# Altium PCB PWR_REG_TEMP.PcbDoc
Units mil, origin at the board's own origin, x right, y up, seen from the top; angles counter-clockwise.
Board outline 8267.72 x 11122.05 mil, 2 copper layers (Top Layer, Bottom Layer); 104 components, 567 nets, 996 pads, 70 vias.
Unrouted connection lines stored in the file: 415.
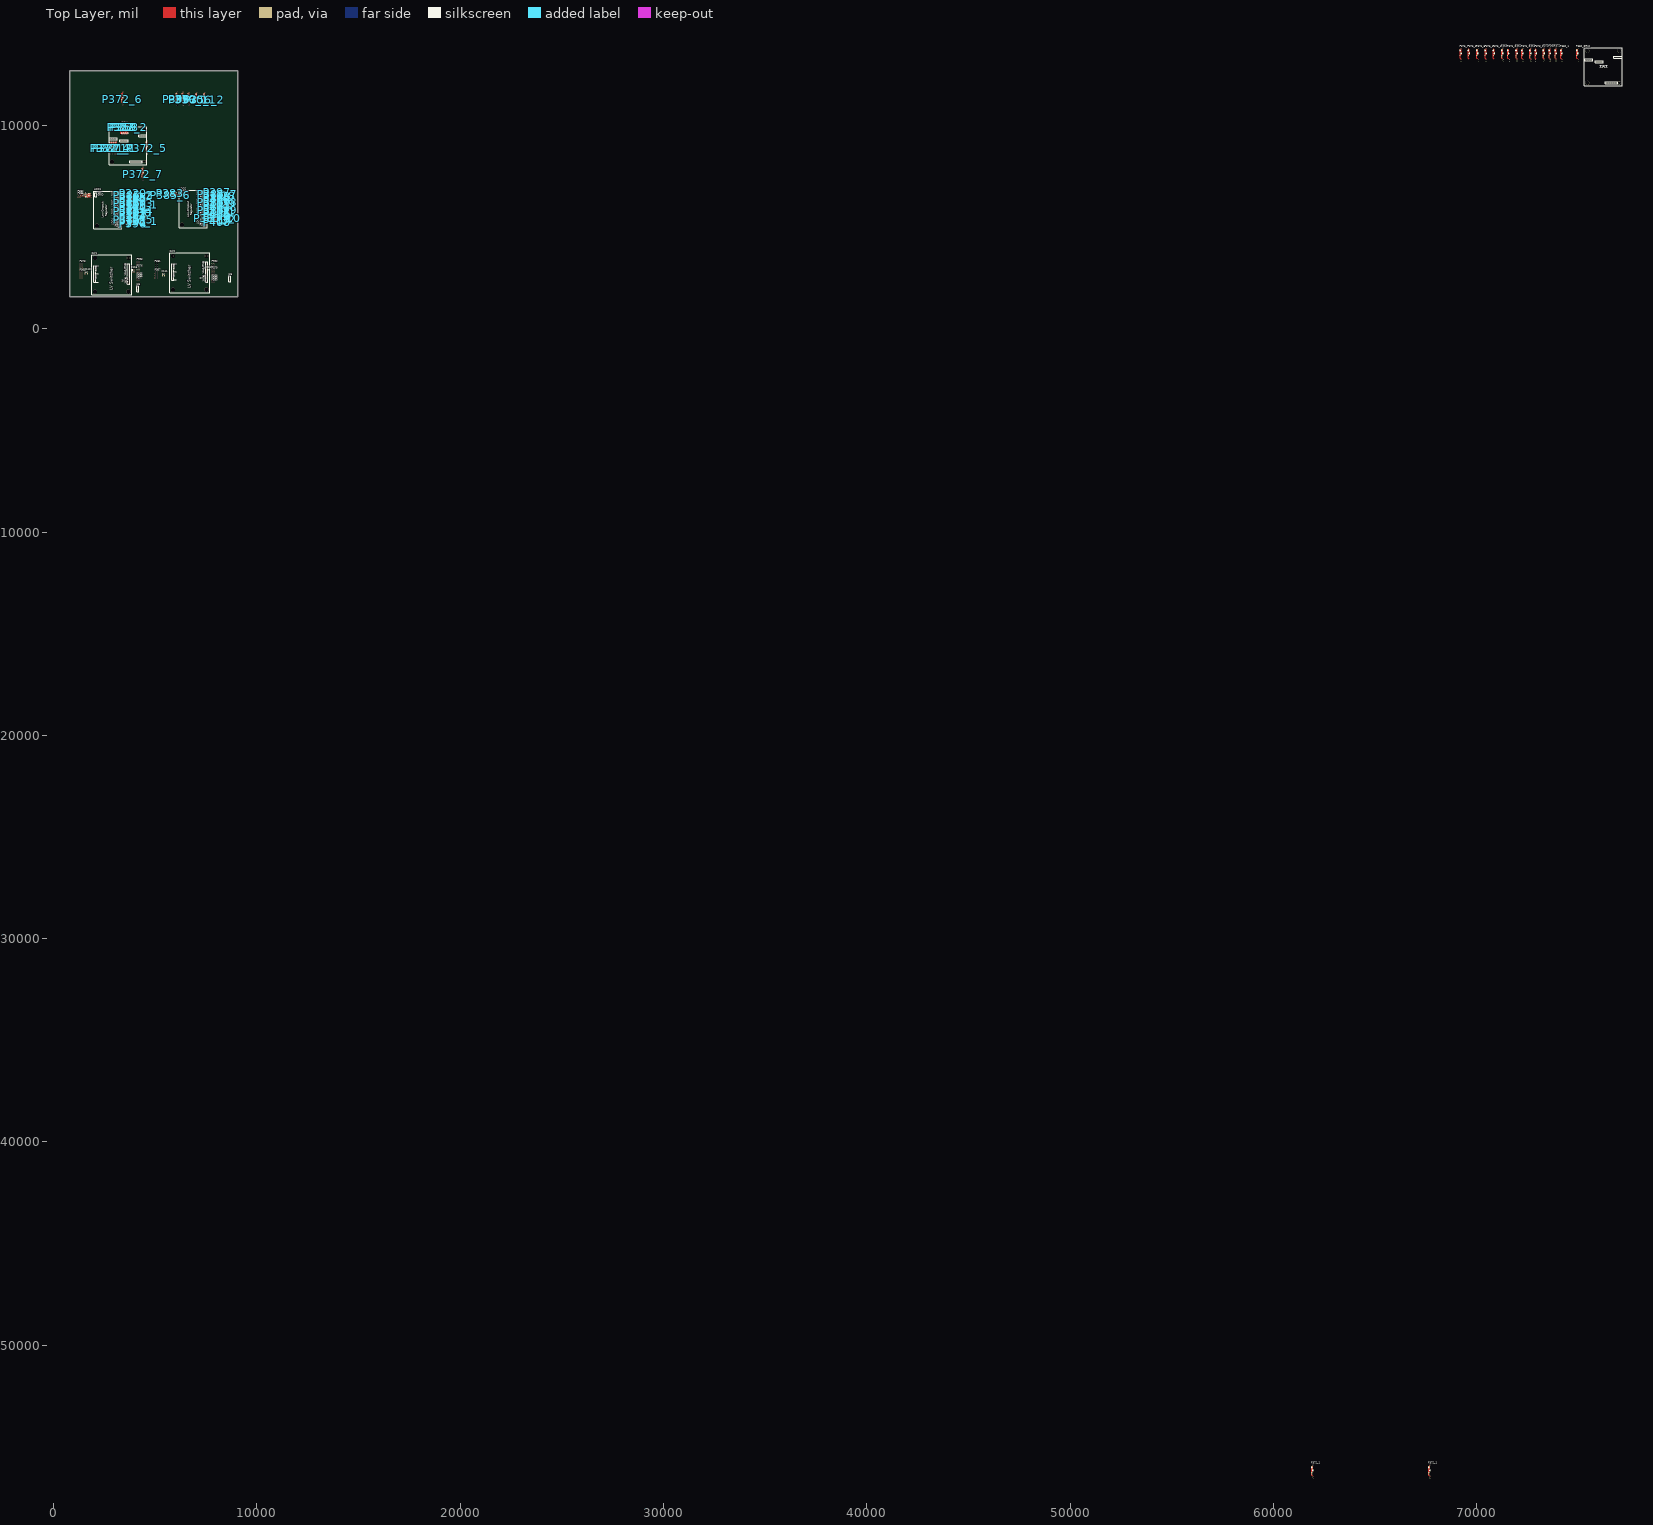
[diagram p0: Top Layer view]
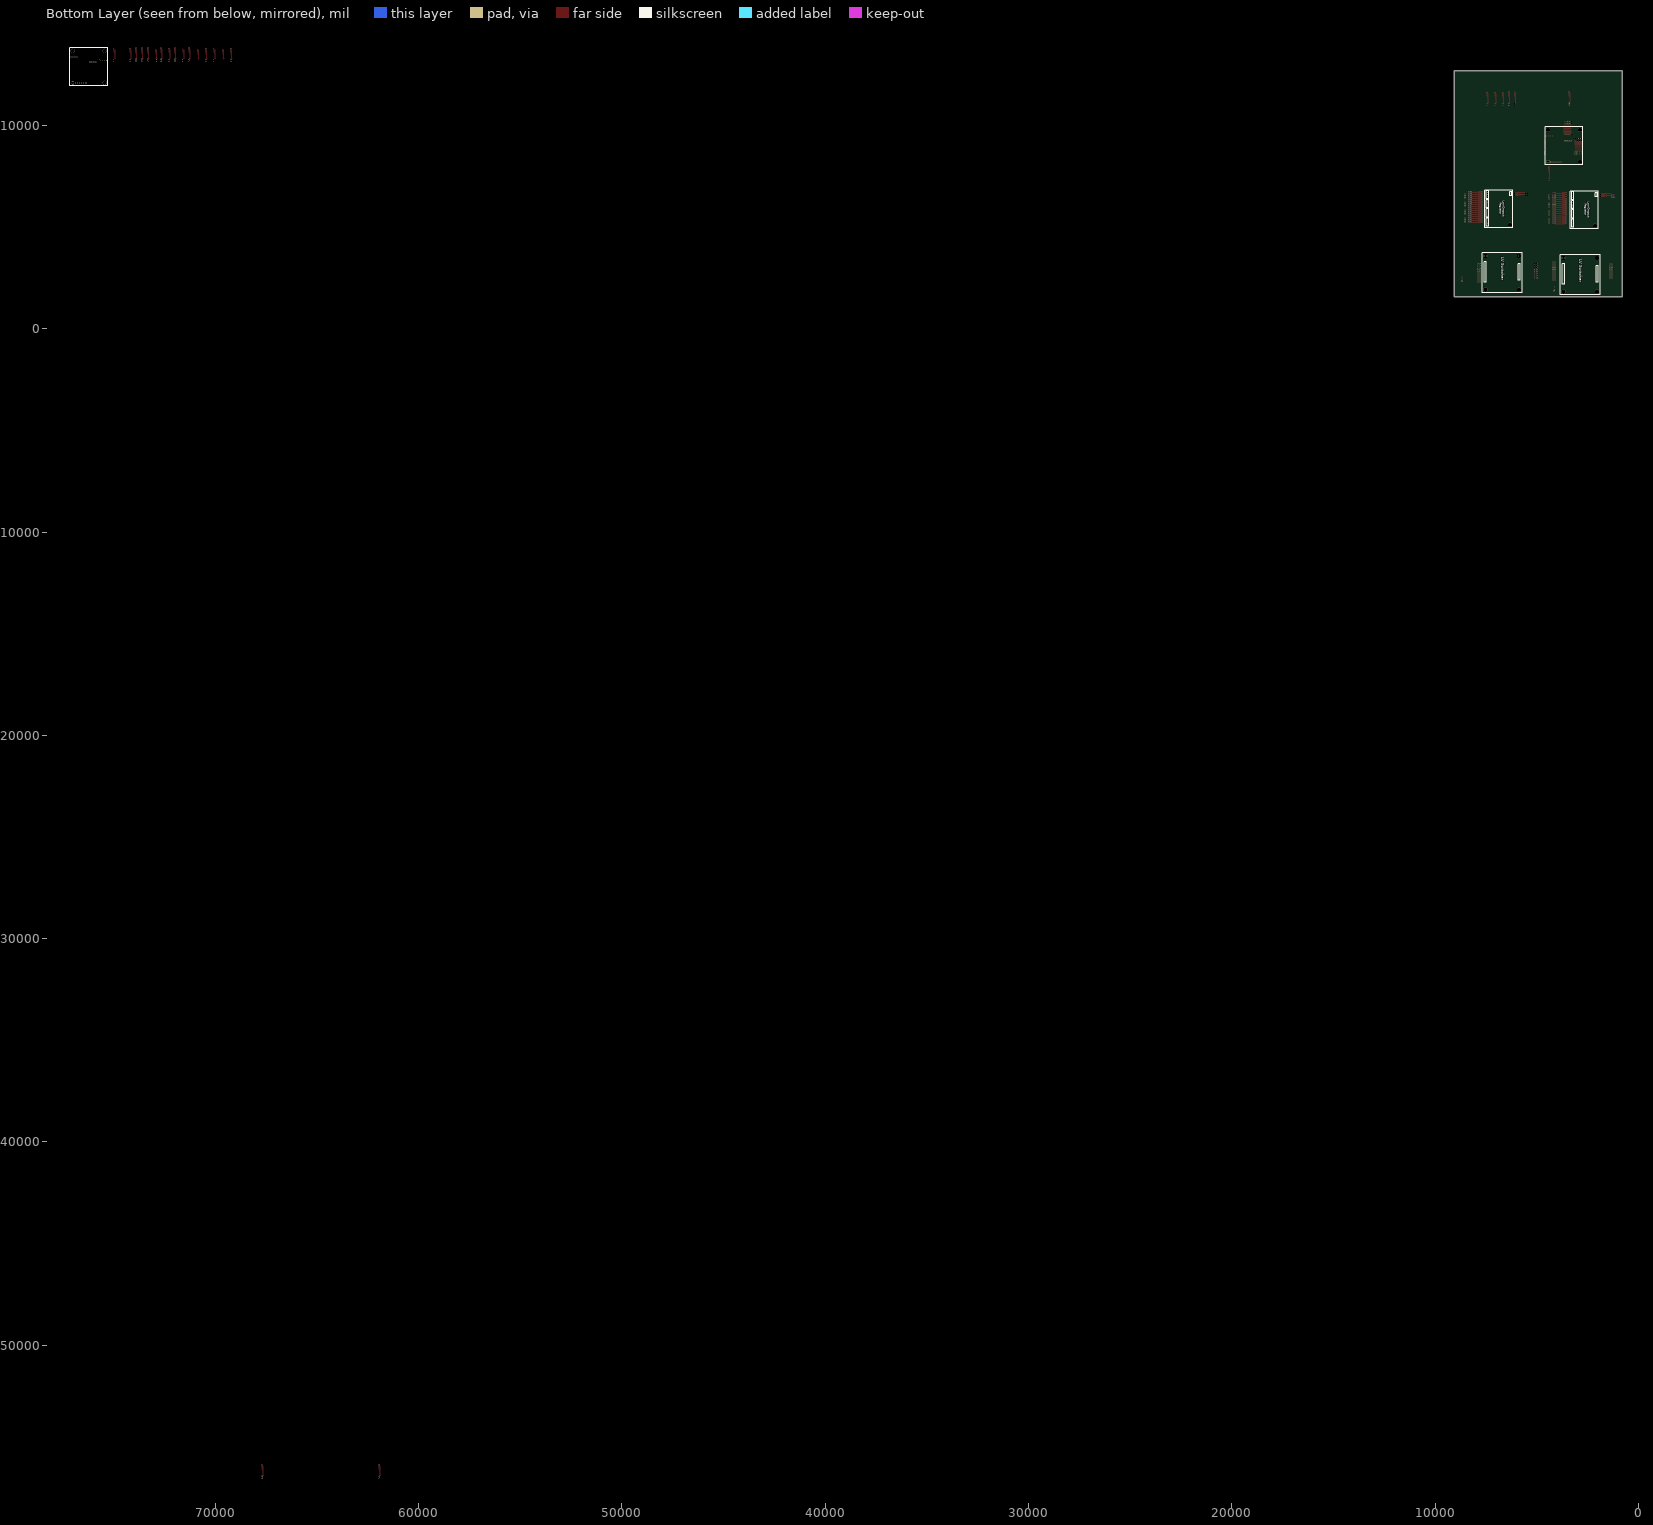
[diagram p1: Bottom Layer view, seen from below]

## Layer stack, top to bottom
Top Layer: signal copper 1.4
Dielectric: dielectric 12.6, FR-4, Dk 4.8
Bottom Layer: signal copper 1.4

## Board outline
787.4,1574.8 9055.12,1574.8 9055.12,12696.85 787.4,12696.85 787.4,12598.43

## Design rules (kind name [scope] priority, off if disabled: settings)
Clearance [All] p1: gap=10
PolygonConnect [All] p1: connectstyle=Relief reliefconductorwidth=10 reliefentries=4 polygonreliefangle="90 Angle"
RoomDefinition TRX2 [InComponentClass('TRX2')] p1: confinementstyle=ConfineIn formatcopy=TRUE lockcomponents=FALSE outline 69140,11940 80610,11940 80610,13940 69140,13940
RoomDefinition SW2 [InComponentClass('SW2')] p2: confinementstyle=ConfineIn formatcopy=TRUE lockcomponents=FALSE outline 0,0 2000,0 2000,1000 0,1000
RoomDefinition SW1 [InComponentClass('SW1')] p3: confinementstyle=ConfineIn formatcopy=TRUE lockcomponents=FALSE outline 0,0 2000,0 2000,1000 0,1000
RoomDefinition LDO2 [InComponentClass('LDO2')] p4: confinementstyle=ConfineIn formatcopy=TRUE lockcomponents=FALSE outline 0,0 2000,0 2000,1000 0,1000
RoomDefinition LDO1 [InComponentClass('LDO1')] p5: confinementstyle=ConfineIn formatcopy=TRUE lockcomponents=FALSE outline 0,0 2000,0 2000,1000 0,1000
RoutingVias [All] p1: holewidth=28 width=50 viastyle="Through Hole" minholewidth=28 minwidth=50 maxholewidth=28 maxwidth=50
SilkscreenOverComponentPads [All] p1: minsilkscreentomaskgap=10
SolderMaskExpansion [All] p1: expansion=4
Width [All] p1: maxlimit=10 minlimit=10 preferedwidth=10
27 further rules are at their usual default settings.

## Classes and differential pairs
component class LDO1: J27 J27_1 J30 J30_1 LDO1 P320 P382 P385_1 P385_2 P385_3 P385_4 P385_5 P386 P387 P388 P389 P390 P391 P392 P393 P394 P395 P396
component class LDO2: J28 J29 J31 J32 LDO2 P383 P385_6 P385_7 P385_8 P385_9 P385_10 P397 P398 P399 P400 P401 P402 P403 P404 P405 P406 P407 P408
component class SW1: F110 F116 J25 P364 P365 P366 P376 P377 P378 P993 SW1
component class SW2: F111 F117 J26 P367 P368 P369 P379 P380 P381 P992 SW2
component class TRX1: P356 P356_1 P356_2 P357 P358 P359 P370 P370_1 P371 P371_1 P372_1 P372_2 P372_3 P372_4 P372_5 P372_6 P372_7 TRX1
component class TRX2: P360 P360_1 P360_2 P361 P362 P363 P372 P372_1 P373 P373_1 P375_1 P375_2 P375_3 P375_4 P375_5 P375_6 P375_7 TRX2

## Components (designator, comment, footprint, x,y, rotation, side; value= is the part's Value field where it differs from the comment)
F110 "FilterPwr" FILTERPWR 1600,2701.57 r0 top
F111 "FilterPwr" FILTERPWR 5400,2603.15 r0 top
F116 "FilterPwr" FILTERPWR 3900,2801.57 r0 top
F117 "FilterPwr" FILTERPWR 7600,2803.15 r0 top
J25 "SW1_EN" HDR1X3 4133.86,1870.08 r90 top
J26 "SW2_EN" HDR1X3 8661.42,2362.2 r90 top
J27 "PWR" HDR1X3 4400,6400 r90 top
J27_1 "COMMS" HDR1X3 4400,6000 r90 top
J28 "BCR" HDR1X3 8530.71,6443.7 r90 top
J29 "TELEM" HDR1X3 8530.71,6050 r90 top
J30 "CSC" HDR1X3 4400,5600 r90 top
J30_1 "AUX_3" HDR1X3 4400,5200 r90 top
J31 "BBONE" HDR1X3 8530.71,5656.3 r90 top
J32 "AUX_5" HDR1X3 8530.71,5262.6 r90 top
LDO1 "3V3" LDO 1979.53,4921.26 r0 top
LDO2 "5V0" LDO 6168.5,4967.32 r0 top
P320 "Jumper_Filter" Jumper_filter 4200,6700 r180 top
P356 "Jumper_Filter" Jumper_filter 6080,10990 r90 top
P356_1 "Jumper_Filter" Jumper_filter 6660,10980 r90 top
P356_2 "Jumper_Filter" Jumper_filter 7440,10980 r90 top
P357 "Jumper_Filter" Jumper_filter 3300,10200 r270 top
P358 "Jumper_Filter" Jumper_filter 3500,10200 r270 top
P359 "Jumper_Filter" Jumper_filter 3400,10200 r270 top
P360 "Jumper_Filter" Jumper_filter 73620,13160 r90 top
P360_1 "Jumper_Filter" Jumper_filter 74200,13150 r90 top
P360_2 "Jumper_Filter" Jumper_filter 74980,13150 r90 top
P361 "Jumper_Filter" Jumper_filter 72670,13160 r90 top
P362 "Jumper_Filter" Jumper_filter 71990,13160 r90 top
P363 "Jumper_Filter" Jumper_filter 71290,13160 r90 top
P364 "Jumper3" JUMPER4 1300,2801.57 r0 top
P365 "Jumper" Jumper 4200,2601.57 r180 top
P366 "Jumper" Jumper 4200,2501.57 r180 top
P367 "Jumper3" JUMPER4 5000,2803.15 r0 top
P368 "Jumper" Jumper 7900,2503.15 r180 top
P369 "Jumper" Jumper 7800,2403.15 r0 top
P370 "Jumper_Filter" Jumper_filter 6370,10990 r90 top
P370_1 "Jumper_Filter" Jumper_filter 7050,10980 r90 top
P371 "Jumper_Filter" Jumper_filter 3000,8600 r90 top
P371_1 "Jumper_Filter" Jumper_filter 3100,8600 r90 top
P372 "Jumper_Filter" Jumper_filter 73910,13160 r90 top
P372_1 "Jumper_Filter" Jumper_filter 67700,-56550 r90 top
P372_1 "Jumper_Filter" Jumper_filter 61940,-56550 r90 top
P372_2 "Jumper_Filter" Jumper_filter 3600,10200 r270 top
P372_3 "Jumper_Filter" Jumper_filter 2900,8600 r90 top
P372_4 "Jumper_Filter" Jumper_filter 2800,8600 r90 top
P372_5 "Jumper_Filter" Jumper_filter 4600,8600 r90 top
P372_6 "Jumper_Filter" Jumper_filter 3400,11000 r90 top
P372_7 "Jumper_Filter" Jumper_filter 4400,7300 r90 top
P373 "Jumper_Filter" Jumper_filter 73330,13160 r90 top
P373_1 "Jumper_Filter" Jumper_filter 72940,13150 r90 top
P375_1 "Jumper_Filter" Jumper_filter 72280,13150 r90 top
P375_2 "Jumper_Filter" Jumper_filter 71580,13150 r90 top
P375_3 "Jumper_Filter" Jumper_filter 70880,13150 r90 top
P375_4 "Jumper_Filter" Jumper_filter 70470,13150 r90 top
P375_5 "Jumper_Filter" Jumper_filter 70060,13150 r90 top
P375_6 "Jumper_Filter" Jumper_filter 69650,13150 r90 top
P375_7 "Jumper_Filter" Jumper_filter 69240,13150 r90 top
P376 "Jumper3" JUMPER4 4100,3001.57 r0 top
P377 "Jumper" Jumper 4200,2401.57 r180 top
P378 "Jumper3" JUMPER4 1300,3201.57 r0 top
P379 "Jumper3" JUMPER4 7800,2903.15 r0 top
P380 "Jumper" Jumper 7800,2303.15 r0 top
P381 "Jumper3" JUMPER4 5000,3203.15 r0 top
P382 "Jumper_Filter" Jumper_filter 1200,6600 r0 top
P383 "Jumper_Filter" Jumper_filter 5447.24,6652.36 r0 top
P385_1 "Jumper_Filter" Jumper_filter 1200,6500 r0 top
P385_2 "Jumper_Filter" Jumper_filter 4200,6600 r180 top
P385_3 "Jumper_Filter" Jumper_filter 4200,6200 r180 top
P385_4 "Jumper_Filter" Jumper_filter 4200,5800 r180 top
P385_5 "Jumper_Filter" Jumper_filter 4200,5400 r180 top
P385_6 "Jumper_Filter" Jumper_filter 5447.24,6552.36 r0 top
P385_7 "Jumper_Filter" Jumper_filter 8333.86,6640.55 r180 top
P385_8 "Jumper_Filter" Jumper_filter 8333.86,6246.85 r180 top
P385_9 "Jumper_Filter" Jumper_filter 8333.86,5853.15 r180 top
P385_10 "Jumper_Filter" Jumper_filter 8333.86,5459.45 r180 top
P386 "Jumper_Filter" Jumper_filter 4200,6500 r180 top
P387 "Jumper_Filter" Jumper_filter 4200,6400 r180 top
P388 "Jumper_Filter" Jumper_filter 4200,6300 r180 top
P389 "Jumper_Filter" Jumper_filter 4200,6100 r180 top
P390 "Jumper_Filter" Jumper_filter 4200,6000 r180 top
P391 "Jumper_Filter" Jumper_filter 4200,5900 r180 top
P392 "Jumper_Filter" Jumper_filter 4200,5700 r180 top
P393 "Jumper_Filter" Jumper_filter 4200,5600 r180 top
P394 "Jumper_Filter" Jumper_filter 4200,5500 r180 top
P395 "Jumper_Filter" Jumper_filter 4200,5300 r180 top
P396 "Jumper_Filter" Jumper_filter 4200,5200 r180 top
P397 "Jumper_Filter" Jumper_filter 8333.86,6738.98 r180 top
P398 "Jumper_Filter" Jumper_filter 8333.86,6542.13 r180 top
P399 "Jumper_Filter" Jumper_filter 8333.86,6443.7 r180 top
P400 "Jumper_Filter" Jumper_filter 8333.86,6345.28 r180 top
P401 "Jumper_Filter" Jumper_filter 8333.86,6148.43 r180 top
P402 "Jumper_Filter" Jumper_filter 8333.86,6050 r180 top
P403 "Jumper_Filter" Jumper_filter 8333.86,5951.57 r180 top
P404 "Jumper_Filter" Jumper_filter 8333.86,5754.72 r180 top
P405 "Jumper_Filter" Jumper_filter 8333.86,5656.3 r180 top
P406 "Jumper_Filter" Jumper_filter 8333.86,5557.87 r180 top
P407 "Jumper_Filter" Jumper_filter 8333.86,5361.02 r180 top
P408 "Jumper_Filter" Jumper_filter 8333.86,5262.6 r180 top
P992 "Jumper" Jumper3 7800,3203.15 r0 top
P993 "Jumper" Jumper3 4100,3301.57 r0 top
SW1 "3.3V" LVSwitcher 1870.08,1673.23 r0 top
SW2 "5V" LVSwitcher 5708.66,1771.65 r0 top
TRX1 "TRX_REGULATOR" TRX_REGULATOR 2740,8100 r0 top
TRX2 "TRX_REGULATOR" TRX_REGULATOR 75320,11980 r0 top

## Footprints (in the part's own frame and the unit in brackets; to place one, negate y for a bottom-side part, rotate by r counter-clockwise, add the part's x,y. Pads: shape width x height; smd on the part's side, far side on the other; paste and mask are expansions set on the pad)
FILTERPWR [mm]
  rect 1.15x1.7 smd: 1(-1.425,2.35) 2(1.425,0) 2(1.425,2.35) 3(-1.425,0)
  silkscreen extent 0,1.7 0,3, body extent -1.63,-0.82 1.62,3.17, height 0.7
HDR1X3 [mm] "Connector; Header; 3 Position"
  rect 1.5x1.5 hole 0.9: 1(0,0)
  round 1.5 hole 0.9: 2(2.54,0) 3(5.08,0)
  silkscreen extent -1.27,-1.27 6.35,1.27
Jumper [mm] "Connector; Header; 2 Position"
  round 1.5 hole 0.9: 1(0,0) 2(2.54,0)
Jumper3 [mm] "Connector; Header; 2 Position"
  round 1.5 hole 0.9: 1(0,-5.08) 1(0,-2.54) 1(0,0) 2(2.54,-5.08) 2(2.54,-2.54) 2(2.54,0)
JUMPER4 [mm] "Connector; Header; 2 Position"
  round 1.5 hole 0.9: 1(0,-7.62) 1(0,-5.08) 1(0,-2.54) 1(0,0) 2(2.54,-7.62) 2(2.54,-5.08) 2(2.54,-2.54) 2(2.54,0)
Jumper_filter [mm] "Connector; Header; 2 Position"
  round 1.5 hole 0.9: 1(0,0) 2(2.54,0)
  rect 1x1.4 smd: 2(5.35,1.27) 2(7.35,1.27) 2(9.16,0) 2(12.97,1.27) 2(14.97,1.27) 3(11.16,0)
  Top Layer lines w0.152: 14.986,1.27 5.334,1.27 ; 7.366,1.27 7.366,1.016
  Top Layer lines w0.254: 16.51,0 11.43,0 ; 12.954,1.27 7.366,1.27 ; 9.144,1.27 9.144,0 ; 5.08,1.27 3.81,1.27 2.54,0
  silkscreen extent 10.16,-0.65 13.97,1.92, body extent 5.25,-0.65 15.07,1.92, height 0.5
LDO [mm] "Low-dropout Regulator"
  round 1.5 hole 0.9: EN1(31.75,40.132) EN2(31.75,28.702) EN3(31.75,17.272) EN4(31.75,5.842) GND(31.75,8.382) GND(31.75,19.812) GND(31.75,31.242) GND(31.75,42.672) VIN(2.54,43.942) VOUT1(31.75,45.212) VOUT2(31.75,33.782) VOUT3(31.75,22.352) VOUT4(31.75,10.922)
  rect 1.5x1.5 hole 0.9: GND(2.54,41.402) RST1(31.75,37.592) RST2(31.75,26.162) RST3(31.75,14.732) RST4(31.75,3.302)
  round 1 hole 0.3: ""(1.683,3.81) ""(1.951,2.81) ""(1.951,4.81) ""(2.683,2.078) ""(2.683,5.542) ""(3.683,1.81) ""(3.683,5.81) ""(4.683,2.078) ""(4.683,5.542) ""(5.415,2.81) ""(5.415,4.81) ""(5.683,3.81)
  round 5 hole 3: ""(3.683,3.81)
  silkscreen extent 0,0 34.9,46.9
LVSwitcher [mm] "Low-Voltage Switching Regulator"
  round 1.5 hole 0.9: EN(46,19.615) GND(3.975,27.235) GND(3.975,29.775) GND(3.975,32.315) GND(46,32.315) GND(46,34.855) GND(46,37.395) SYNC(46,17.075) Vin(3.975,17.075) Vin(3.975,19.615) Vin(3.975,22.155) Vin(3.975,24.695) Vout(46,22.155) Vout(46,24.695) Vout(46,27.235) Vout(46,29.775)
  rect 1.5x1.5 hole 0.9: GND(3.975,34.855) PG(46,14.535)
  round 1 hole 0.3: ""(2,4) ""(2,46) ""(2.268,3) ""(2.268,5) ""(2.268,45) ""(2.268,47) ""(3,2.268) ""(3,5.732) ""(3,44.268) ""(3,47.732) ""(4,2) ""(4,6) ""(4,44) ""(4,48) ""(5,2.268) ""(5,5.732) ""(5,44.268) ""(5,47.732) ""(5.732,3) ""(5.732,5) ""(5.732,45) ""(5.732,47) ""(6,4) ""(6,46) ""(44,4) ""(44,46) ""(44.268,3) ""(44.268,5) ""(44.268,45) ""(44.268,47) ""(45,2.268) ""(45,5.732) ""(45,44.268) ""(45,47.732) ""(46,2) ""(46,6) ""(46,44) ""(46,48) ""(47,2.268) ""(47,5.732) ""(47,44.268) ""(47,47.732) ""(47.732,3) ""(47.732,5) ""(47.732,45) ""(47.732,47) ""(48,4) ""(48,46)
  round 5 hole 3: ""(4,4) ""(4,46) ""(46,4) ""(46,46)
  silkscreen extent 0,0 50,50
TRX_REGULATOR [mm]
  round 1.5 hole 0.9: 1(27.018,2.962) 1(29.558,2.962) 1(32.098,2.962) 2(3.65,32.045) 2(34.638,2.962) 2(37.178,2.962) 2(42.791,35.27) 3(19.474,29.149) 4(16.934,29.149) 5(37.711,35.27) 5(40.251,35.27) 6(6.19,32.045) 6(8.73,32.045) 7(14.394,29.149)
  rect 1.5x1.5 hole 0.9: 2(1.11,32.045) 2(22.014,29.149) 2(39.718,2.962) 2(45.331,35.27)
  round 1 hole 0.3: ""(1.291,3.161) ""(1.291,43.161) ""(1.559,2.161) ""(1.559,4.161) ""(1.559,42.161) ""(1.559,44.161) ""(2.291,1.429) ""(2.291,4.893) ""(2.291,41.429) ""(2.291,44.893) ""(3.291,1.161) ""(3.291,5.161) ""(3.291,41.161) ""(3.291,45.161) ""(4.291,1.429) ""(4.291,4.893) ""(4.291,41.429) ""(4.291,44.893) ""(5.023,2.161) ""(5.023,4.161) ""(5.023,42.161) ""(5.023,44.161) ""(5.291,3.161) ""(5.291,43.161) ""(41.291,43.161) ""(41.559,42.161) ""(41.559,44.161) ""(42.291,41.429) ""(42.291,44.893) ""(43.291,41.161) ""(43.291,45.161) ""(44.291,41.429) ""(44.291,44.893) ""(45.023,42.161) ""(45.023,44.161) ""(45.291,43.161)
  round 5 hole 3: ""(3.291,3.161) ""(3.291,43.161) ""(43.291,43.161)
  round 4 hole 3.5: ""(43.291,3.161)
  silkscreen extent -0.41,-0.54 46.98,46.86

## Part data
J25 J26 J27 J27_1 J28 J29 J30 J30_1 J31 J32: library part "Header 3", "Header, 3-Pin"
LDO1 LDO2: library part LDO
SW1 SW2: library part LVSWITCHER

## Via types
v1: diameter 40, hole 20, Top Layer to Bottom Layer, 70 vias

## Nets (pads, with @x,y where several pads share a name; then routed paths per layer and width w, separated by ;. In a path a pad name is that pad's centre, name@x,y a point inside that pad or via, vN(x,y) a via of type N, cw(c..) or ccw(c..) an arc to the next point about the centre after c; other vN are vias at no path point)
3V3_AUX: P394.1
3V3_AUX_E\N\: J30_1.2 P395.1
3V3_BBONE: 
3V3_COMMS: P388.1
3V3_CSC: P391.1
3V3_PWR: P320.1 P357.1 P361.1
3V3_UNREG: J27.1 J27_1.1 J30.1 J30_1.1 P376.2 P382.1
5V0_AUX: P406.1
5V0_AUX_E\N\: J32.2 P407.1
5V0_BBONE: P403.1
5V0_BCR: P397.1
5V0_TELEM: P400.1
5V0_UNREG: J28.1 J29.1 J31.1 J32.1 P379.2 P383.1
8V0_RX1: P370.1 P370_1.1
8V0_RX2: 
AFSK1_DET: 
AFSK1_M0: 
AFSK1_M1: 
AFSK1_RX: 
AFSK1_RXD: 
AFSK1_TX: 
AFSK1_TXD: 
AFSK2_DET: 
AFSK2_M0: 
AFSK2_M1: 
AFSK2_RX: 
AFSK2_RXD: 
AFSK2_TX: 
AFSK2_TXD: 
BBONE_E\N\: J31.2 P404.1
BBONE_I2C2_SCL: 
BBONE_I2C2_SDA: 
BCR_E\N\: J28.2 P398.1
BCR_MISO: 
BCR_MOSI: 
BCR_R\S\T\: 
BCR_SCK: 
COMMS_E\N\: J27_1.2 P389.1
CSC_E\N\: J30.2 P392.1
CSC_ISP: 
CSC_RST: 
DTMF1Q1: 
DTMF1Q2: 
DTMF1Q3: 
DTMF1Q4: 
DTMF1ST: 
DTMF2Q1: 
DTMF2Q2: 
DTMF2Q3: 
DTMF2Q4: 
DTMF2ST: 
GND: F110.3 F111.3 F116.3 F117.3 J25.1 J26.1 J27.3 J27_1.3 J28.3 J29.3 J30.3 J30_1.3 J31.3 J32.3 P320.3 P356.3 P356_1.3 P356_2.3 P357.3 P358.3 P359.3 P360.3 P360_1.3 P360_2.3 P361.3 P362.3 P363.3 P370.3 P370_1.3 P371.3 P371_1.3 P372.3 P372_1.1@67700,-56550 P372_1.3@67700,-56110.63 P372_2.1 P372_2.3 P372_3.1 P372_3.3 P372_4.1 P372_4.3 P372_5.1 P372_5.3 P372_6.1 P372_6.3 P372_7.1 P372_7.3 P373.3 P373_1.3 P375_1.1 P375_1.3 P375_2.1 P375_2.3 P375_3.1 P375_3.3 P375_4.1 P375_4.3 P375_5.1 P375_5.3 P375_6.1 P375_6.3 P375_7.1 P375_7.3 P378.2 P381.2 P382.3 P383.3 P385_1.1 P385_1.3 P385_2.1 P385_2.3 P385_3.1 P385_3.3 P385_4.1 P385_4.3 P385_5.1 P385_5.3 P385_6.1 P385_6.3 P385_7.1 P385_7.3 P385_8.1 P385_8.3 P385_9.1 P385_9.3 P385_10.1 P385_10.3 P386.3 P387.3 P388.3 P389.3 P390.3 P391.3 P392.3 P393.3 P394.3 P395.3 P396.3 P397.3 P398.3 P399.3 P400.3 P401.3 P402.3 P403.3 P404.3 P405.3 P406.3 P407.3 P408.3 P992.2 P993.2
  other v1: 67700,-55900 3550,5200 7683.86,5262.6 3550,5300 7683.86,5361.02 3550,5400 7683.86,5459.45 3550,5500 7683.86,5557.87 3550,5600 7683.86,5656.3 3550,5700 7683.86,5754.72 3550,5800 7683.86,5853.15 3550,5900 7683.86,5951.57 3550,6000 7683.86,6050 3550,6100 7683.86,6148.43 3550,6200 7683.86,6246.85 7683.86,6345.28 3550,6400 7683.86,6443.7 1850,6500 3550,6500 7683.86,6542.13 6097.24,6552.36 1850,6600 3550,6600 7683.86,6640.55 6097.24,6652.36 3550,6700 7683.86,6738.98 4400,7950 2800,9250 2900,9250 3000,9250 3100,9250 4600,9250 3300,9550 3400,9550 3500,9550 3600,9550 6660,11630 7050,11630 7440,11630 6080,11640 6370,11640 3400,11650 69240,13800 69650,13800 70060,13800 70470,13800 70880,13800 71580,13800 72280,13800 72940,13800 74200,13800 74980,13800 71290,13810 71990,13810 72670,13810 73330,13810 73620,13810 73910,13810
I2C0_SCL: P359.1 P363.1
I2C0_SDA: P358.1 P362.1
I2C1_SCL: 
I2C1_SDA: 
I2C2_SCL: 
I2C2_SCL_5V: 
I2C2_SDA: 
I2C2_SDA_5V: 
NetBBONE1_A01: 
NetBBONE1_A02: 
NetBBONE1_A03: 
NetBBONE1_A04: 
NetBBONE1_A05: 
NetBBONE1_A06: 
NetBBONE1_A07: 
NetBBONE1_A08: 
NetBBONE1_A09: 
NetBBONE1_A10: 
NetBBONE1_A11: 
NetBBONE1_A12: 
NetBBONE1_A13: 
NetBBONE1_A14: 
NetBBONE1_A15: 
NetBBONE1_A16: 
NetBBONE1_A17: 
NetBBONE1_A18: 
NetBBONE1_A19: 
NetBBONE1_A20: 
NetBBONE1_A21: 
NetBBONE1_A22: 
NetBBONE1_A23: 
NetBBONE1_A24: 
NetBBONE1_A25: 
NetBBONE1_A26: 
NetBBONE1_A27: 
NetBBONE1_A28: 
NetBBONE1_A29: 
NetBBONE1_A30: 
NetBBONE1_A31: 
NetBBONE1_A32: 
NetBBONE1_A33: 
NetBBONE1_A34: 
NetBBONE1_A35: 
NetBBONE1_A36: 
NetBBONE1_A37: 
NetBBONE1_A38: 
NetBBONE1_A39: 
NetBBONE1_A40: 
NetBBONE1_A41: 
NetBBONE1_A42: 
NetBBONE1_A43: 
NetBBONE1_A44: 
NetBBONE1_A45: 
NetBBONE1_A46: 
NetBBONE1_B01: 
NetBBONE1_B02: 
NetBBONE1_B03: 
NetBBONE1_B04: 
NetBBONE1_B05: 
NetBBONE1_B06: 
NetBBONE1_B07: 
NetBBONE1_B08: 
NetBBONE1_B09: 
NetBBONE1_B10: 
NetBBONE1_B11: 
NetBBONE1_B12: 
NetBBONE1_B13: 
NetBBONE1_B14: 
NetBBONE1_B15: 
NetBBONE1_B16: 
NetBBONE1_B17: 
NetBBONE1_B18: 
NetBBONE1_B19: 
NetBBONE1_B20: 
NetBBONE1_B21: 
NetBBONE1_B22: 
NetBBONE1_B23: 
NetBBONE1_B24: 
NetBBONE1_B25: 
NetBBONE1_B26: 
NetBBONE1_B27: 
NetBBONE1_B28: 
NetBBONE1_B29: 
NetBBONE1_B30: 
NetBBONE1_B31: 
NetBBONE1_B32: 
NetBBONE1_B33: 
NetBBONE1_B34: 
NetBBONE1_B35: 
NetBBONE1_B36: 
NetBBONE1_B37: 
NetBBONE1_B38: 
NetBBONE1_B39: 
NetBBONE1_B40: 
NetBBONE1_B41: 
NetBBONE1_B42: 
NetBBONE1_B43: 
NetBBONE1_B44: 
NetBBONE1_B45: 
NetBBONE1_B46: 
NetBBONE1_P01: 
NetBBONE1_P02: 
NetBBONE1_P03: 
NetBBONE1_P04: 
NetBBONE1_P05: 
NetBBONE1_P06: 
NetBBONE1_P07: 
NetBBONE1_P08: 
NetBBONE1_P09: 
NetBBONE1_P10: 
NetBCR1_1: 
NetBCR1_2: 
NetBCR1_3: 
NetBCR1_4: 
NetBCR1_5: 
NetBCR1_6: 
NetBCR1_7: 
NetBCR1_8: 
NetBCR1_9: 
NetBCR1_10: 
NetBCR1_11: 
NetBCR1_12: 
NetBCR1_13: 
NetBCR1_14: 
NetBCR1_15: 
NetBCR1_16: 
NetBCR1_17: 
NetBCR1_18: 
NetBCR1_19: 
NetBCR1_20: 
NetBCR1_21: 
NetBCR1_22: 
NetBCR1_23: 
NetBCR1_24: 
NetBCR1_25: 
NetBCR1_26: 
NetBCR1_27: 
NetBCR1_28: 
NetBCR1_29: 
NetBCR1_30: 
NetBCR1_31: 
NetBCR1_32: 
NetBCR1_33: 
NetBCR1_34: 
NetBCR1_35: 
NetC1_2: 
NetCOMMS1_AFSK1_M0: 
NetCOMMS1_AFSK1_M1: 
NetCOMMS1_AFSK1_RXD: 
NetCOMMS1_AFSK1_TXD: 
NetCOMMS1_AFSK2_M0: 
NetCOMMS1_AFSK2_M1: 
NetCOMMS1_AFSK2_RXD: 
NetCOMMS1_AFSK2_TXD: 
NetCOMMS1_DTMF1_ES: 
NetCOMMS1_DTMF1_Q1: 
NetCOMMS1_DTMF1_Q2: 
NetCOMMS1_DTMF1_Q3: 
NetCOMMS1_DTMF1_Q4: 
NetCOMMS1_DTMF1_ST: 
NetCOMMS1_DTMF2_ES: 
NetCOMMS1_DTMF2_Q1: 
NetCOMMS1_DTMF2_Q2: 
NetCOMMS1_DTMF2_Q3: 
NetCOMMS1_DTMF2_Q4: 
NetCOMMS1_DTMF2_ST: 
NetCOMMS1_GMSK_RX1: 
NetCOMMS1_GMSK_RX2: 
NetCOMMS1_GMSK_TX1: 
NetCOMMS1_GMSK_TX2: 
NetCOMMS1_GND: 
NetCOMMS1_RX1: 
NetCOMMS1_RX2: 
NetCOMMS1_S0: 
NetCOMMS1_S1: 
NetCOMMS1_S2: 
NetCOMMS1_S3: 
NetCOMMS1_S4: 
NetCOMMS1_S5: 
NetCOMMS1_S6: 
NetCOMMS1_S7: 
NetCOMMS1_TX1: 
NetCOMMS1_TX2: 
NetCOMMS1_VCC: 
NetCSC1_C1_1: 
NetCSC1_C1_2: 
NetCSC1_C1_3: 
NetCSC1_C1_4: 
NetCSC1_C1_5: 
NetCSC1_C1_6: 
NetCSC1_C1_7: 
NetCSC1_C1_8: 
NetCSC1_C1_9: 
NetCSC1_C1_10: 
NetCSC1_C1_11: 
NetCSC1_C1_12: 
NetCSC1_C1_13: 
NetCSC1_C1_14: 
NetCSC1_C1_15: 
NetCSC1_C1_16: 
NetCSC1_C1_17: 
NetCSC1_C1_18: 
NetCSC1_C1_19: 
NetCSC1_C1_20: 
NetCSC1_C1_21: 
NetCSC1_C1_22: 
NetCSC1_C1_23: 
NetCSC1_C1_24: 
NetCSC1_C1_25: 
NetCSC1_C1_26: 
NetCSC1_C1_27: 
NetCSC1_C1_28: 
NetCSC1_C1_29: 
NetCSC1_C1_30: 
NetCSC1_C1_31: 
NetCSC1_C1_32: 
NetCSC1_C1_33: 
NetCSC1_C1_34: 
NetCSC1_C1_35: 
NetCSC1_C1_36: 
NetCSC1_C1_37: 
NetCSC1_C1_38: 
NetCSC1_C1_39: 
NetCSC1_C2_1: 
NetCSC1_C2_2: 
NetCSC1_C2_3: 
NetCSC1_C2_4: 
NetCSC1_C2_5: 
NetCSC1_C2_6: 
NetCSC1_C2_7: 
NetCSC1_C2_8: 
NetCSC1_C2_9: 
NetCSC1_C2_10: 
NetCSC1_C2_11: 
NetCSC1_C2_12: 
NetCSC1_C2_13: 
NetCSC1_C2_14: 
NetCSC1_C2_15: 
NetCSC1_C2_16: 
NetCSC1_C2_17: 
NetCSC1_C2_18: 
NetCSC1_C2_19: 
NetCSC1_C2_20: 
NetCSC1_C2_21: 
NetCSC1_C2_22: 
NetCSC1_C2_23: 
NetCSC1_C2_24: 
NetCSC1_C2_25: 
NetCSC1_C2_26: 
NetCSC1_C2_27: 
NetCSC1_C2_28: 
NetCSC1_C2_29: 
NetCSC1_C2_30: 
NetCSC1_C2_31: 
NetCSC1_C2_32: 
NetCSC1_C2_33: 
NetCSC1_C2_34: 
NetCSC1_C2_35: 
NetCSC1_C2_36: 
NetCSC1_C2_37: 
NetCSC1_C2_38: 
NetCSC1_C2_39: 
NetCSC1_C2_40: 
NetCSC1_C3_1: 
NetCSC1_C3_2: 
NetCSC1_C3_3: 
NetCSC1_C3_4: 
NetCSC1_C3_5: 
NetCSC1_C3_6: 
NetCSC1_C3_7: 
NetCSC1_C3_8: 
NetCSC1_C3_9: 
NetCSC1_C3_10: 
NetCSC1_C3_11: 
NetCSC1_C3_12: 
NetCSC1_C3_13: 
NetCSC1_C3_14: 
NetCSC1_C3_15: 
NetCSC1_C3_16: 
NetCSC1_C3_17: 
NetCSC1_C3_18: 
NetCSC1_C3_19: 
NetCSC1_C3_20: 
NetCSC1_C3_21: 
NetCSC1_C3_22: 
NetCSC1_C3_23: 
NetCSC1_C3_24: 
NetCSC1_C3_25: 
NetCSC1_C3_26: 
NetCSC1_C3_27: 
NetCSC1_C3_28: 
NetCSC1_C3_29: 
NetCSC1_C3_30: 
NetCSC1_C3_31: 
NetCSC1_C3_32: 
NetCSC1_C3_33: 
NetCSC1_C3_34: 
NetCSC1_C3_35: 
NetCSC1_C3_36: 
NetCSC1_C3_37: 
NetCSC1_C3_38: 
NetCSC1_C3_39: 
NetCSC1_C3_40: 
NetCSC1_ISP1: 
NetCSC1_ISP2: 
NetCSC1_ISP3: 
NetCSC1_ISP4: 
NetCSC1_ISP5: 
NetCSC1_ISP6: 
NetD1_1: 
NetF50_2: 
NetF51_2: 
NetF52_2: 
NetF53_2: 
NetF54_2: 
NetF55_2: 
NetF56_2: 
NetF57_2: 
NetF58_2: 
NetF59_1: 
NetF60_1: 
NetF61_2: 
NetF62_2: 
NetF86_1: 
NetF87_1: 
NetF88_1: 
NetF89_1: 
NetF91_1: 
NetF92_1: 
NetF93_1: 
NetF94_1: 
NetF95_1: 
NetF96_1: 
NetF97_1: 
NetF98_1: 
NetF99_2: 
NetF100_1: 
NetF101_1: 
NetF102_1: 
NetF103_1: 
NetF104_1: 
NetF105_1: 
NetF110_1: F110.1 P364.2
NetF110_2: F110.2 SW1.Vin
NetF111_1: F111.1 P367.2
NetF111_2: F111.2 SW2.Vin
NetF116_1: F116.1 SW1.Vout
NetF116_2: F116.2 P376.1
NetF117_1: F117.1 SW2.Vout
NetF117_2: F117.2 P379.1
NetGMSK1_1A: 
NetGMSK1_1B: 
NetGMSK1_1C: 
NetGMSK1_2A: 
NetGMSK1_2B: 
NetGMSK1_2C: 
NetGMSK1_3A: 
NetGMSK1_3B: 
NetGMSK1_3C: 
NetGMSK1_4A: 
NetGMSK1_4B: 
NetGMSK1_5A: 
NetGMSK1_5B: 
NetGMSK1_5C: 
NetGMSK1_6A: 
NetGMSK1_6B: 
NetGMSK1_7A: 
NetGMSK1_7B: 
NetGMSK1_7C: 
NetGMSK1_8A: 
NetGMSK1_8B: 
NetGMSK1_8C: 
NetGMSK1_9A: 
NetGMSK1_9B: 
NetGMSK1_10A: 
NetGMSK1_10B: 
NetGMSK1_12A: 
NetGMSK1_12B: 
NetJ15_1: 
NetJ15_2: 
NetJ15_3: 
NetJ15_4: 
NetJ15_5: 
NetJ15_6: 
NetJ15_7: 
NetJ15_8: 
NetJ15_9: 
NetJ16_1: 
NetJ16_2: 
NetJ16_3: 
NetJ16_4: 
NetJ16_5: 
NetJ16_6: 
NetJ16_7: 
NetJ16_8: 
NetJ16_9: 
NetJ25_2: J25.2 P365.1
NetJ26_2: J26.2 P368.1
NetLDO1_EN1: LDO1.EN1 P386.2
NetLDO1_EN2: LDO1.EN2 P389.2
NetLDO1_EN3: LDO1.EN3 P392.2
NetLDO1_EN4: LDO1.EN4 P395.2
NetLDO1_GND: LDO1.GND P385_1.2 P385_2.2 P385_3.2 P385_4.2 P385_5.2
NetLDO1_RST1: LDO1.RST1 P387.2
NetLDO1_RST2: LDO1.RST2 P390.2
NetLDO1_RST3: LDO1.RST3 P393.2
NetLDO1_RST4: LDO1.RST4 P396.2
NetLDO1_VIN: LDO1.VIN P382.2
NetLDO1_VOUT1: LDO1.VOUT1 P320.2
NetLDO1_VOUT2: LDO1.VOUT2 P388.2
NetLDO1_VOUT3: LDO1.VOUT3 P391.2
NetLDO1_VOUT4: LDO1.VOUT4 P394.2
NetLDO2_EN1: LDO2.EN1 P398.2
NetLDO2_EN2: LDO2.EN2 P401.2
NetLDO2_EN3: LDO2.EN3 P404.2
NetLDO2_EN4: LDO2.EN4 P407.2
NetLDO2_GND: LDO2.GND P385_6.2 P385_7.2 P385_8.2 P385_9.2 P385_10.2
NetLDO2_RST1: LDO2.RST1 P399.2
NetLDO2_RST2: LDO2.RST2 P402.2
NetLDO2_RST3: LDO2.RST3 P405.2
NetLDO2_RST4: LDO2.RST4 P408.2
NetLDO2_VIN: LDO2.VIN P383.2
NetLDO2_VOUT1: LDO2.VOUT1 P397.2
NetLDO2_VOUT2: LDO2.VOUT2 P400.2
NetLDO2_VOUT3: LDO2.VOUT3 P403.2
NetLDO2_VOUT4: LDO2.VOUT4 P406.2
NetP234_2: 
NetP273_2: 
NetP275_2: 
NetP276_2: 
NetP297_1: 
NetP298_1: 
NetP299_1: 
NetP300_1: 
NetP356_2: P356.2 P356_1.2 P356_2.2 TRX1.1
NetP357_2: P357.2 TRX1.7
NetP358_2: P358.2 TRX1.3
NetP359_2: P359.2 TRX1.4
NetP360_2: P360.2 P360_1.2 P360_2.2 TRX2.1
NetP361_2: P361.2 TRX2.7
NetP362_2: P362.2 TRX2.3
NetP363_2: P363.2 TRX2.4
NetP365_2: P365.2 SW1.EN
NetP366_2: P366.2 SW1.SYNC
NetP368_2: P368.2 SW2.EN
NetP369_2: P369.2 SW2.SYNC
NetP370_2: P370.2 P370_1.2 TRX1.5
NetP371_2: P371.2 P371_1.2 TRX1.6
NetP372_1_2: P372_2.2 P372_3.2 P372_4.2 P372_5.2 P372_6.2 P372_7.2 TRX1.2
NetP372_2: P372.2 P372_1.2@67650,-55960.63 P372_1.2@67650,-56039.37 P372_1.2@67650,-56260.63 P372_1.2@67650,-56339.37 P372_1.2@67700,-56189.37 P372_1.2@67700,-56450 TRX2.5
NetP373_2: P373.2 P373_1.2 TRX2.6
NetP375_1_2: P375_1.2 P375_2.2 P375_3.2 P375_4.2 P375_5.2 P375_6.2 P375_7.2 TRX2.2
NetP377_1: P377.1 SW1.PG
NetP378_1: P378.1 P993.1 SW1.GND
NetP380_1: P380.1 SW2.PG
NetP381_1: P381.1 P992.1 SW2.GND
PLLACQ1: 
PLLACQ2: 
PWR_E\N\: J27.2 P386.1
RX1_AF: 
RX1_GMSK: 
RX2_AF: 
RX2_GMSK: 
RX_PSAVE1: 
RX_PSAVE2: 
RX_S/N1: 
RX_S/N2: 
RXACQ1: 
RXACQ2: 
RXCLK1: 
RXCLK2: 
RXDATA1: 
RXDATA2: 
RXHOLD1: 
RXHOLD2: 
S0: 
S1: 
S2: 
S3: 
S4: 
S5: 
S6: 
S7: 
SOLA_X+_T: 
SOLA_X+_V: 
SOLA_X-_T: 
SOLA_X-_V: 
SOLA_Y+_T: 
SOLA_Y+_V: 
SOLA_Y-_T: 
SOLA_Y-_V: 
SOLA_Z+_T: 
SOLA_Z+_V: 
SOLA_Z-_T: 
SOLA_Z-_V: 
TBATT: 
TELEM_E\N\: J29.2 P401.1
TX1_AF: 
TX1_GMSK: 
TX2_AF: 
TX2_GMSK: 
TX_PSAVE1: 
TX_PSAVE2: 
TXCLK1: 
TXCLK2: 
TXDATA1: 
TXDATA2: 
TXEN1: 
TXEN2: 
UART0_RX: 
UART0_TX: 
V_BATT: 
V_LOAD: J25.3 J26.3 P356.1 P356_1.1 P356_2.1 P360.1 P360_1.1 P360_2.1 P364.1 P367.1
VVAR_TX1: P371.1 P371_1.1
VVAR_TX2: P373.1 P373_1.1
pads on no net: LDO1. LDO2. P366.1 P369.1 P372.1 P372_1.1@61940,-56550 P372_1.2@61890,-55960.63 P372_1.2@61890,-56039.37 P372_1.2@61890,-56260.63 P372_1.2@61890,-56339.37 P372_1.2@61940,-56189.37 P372_1.2@61940,-56450 P372_1.3@61940,-56110.63 P377.2 P380.2 P387.1 P390.1 P393.1 P396.1 P399.1 P402.1 P405.1 P408.1 SW1. SW2. TRX1. TRX2.
copper on no net:
  other v1: 61940,-55900 3550,6300

## Silkscreen, mask and mechanical layers (free items; w line width, h text height)
Top Overlay:
  circle w10: c4300,6400 r10
  circle w10: c4300,6000 r10
  circle w10: c4300,5600 r10
  circle w10: c4300,5200 r10
  circle w10: c8430.71,5262.6 r10
  circle w10: c8430.71,5656.3 r10
  circle w10: c8430.71,6050 r10
  circle w10: c8430.71,6443.7 r10

## Text inside footprints (layer, text, board x,y; h text height)
LDO1: Top Overlay "Regulator" at 2629.13,5531.5 h78.74 r90; Top Overlay "Low-Dropout" at 2471.65,5452.76 h78.74 r90; Top Overlay "VOUT" at 3003.15,5323.23 h39.37; Top Overlay "GND" at 3003.15,5224.8 h39.37; Top Overlay "EN" at 3003.15,5126.38 h39.37; Top Overlay "RST" at 3003.15,5027.95 h39.37; Top Overlay "LDO4" at 2944.09,5106.69 h59.06 r90; Top Overlay "VOUT" at 3003.15,5773.23 h39.37; Top Overlay "GND" at 3003.15,5674.8 h39.37; Top Overlay "EN" at 3003.15,5576.38 h39.37; Top Overlay "RST" at 3003.15,5477.95 h39.37; Top Overlay "LDO3" at 2944.09,5556.69 h59.06 r90; Top Overlay "VOUT" at 3003.15,6223.23 h39.37; Top Overlay "GND" at 3003.15,6124.8 h39.37; Top Overlay "EN" at 3003.15,6026.38 h39.37; Top Overlay "RST" at 3003.15,5927.95 h39.37; Top Overlay "LDO2" at 2944.09,6006.69 h59.06 r90; Top Overlay "RST" at 3003.15,6377.95 h39.37; Top Overlay "EN" at 3003.15,6476.38 h39.37; Top Overlay "GND" at 3003.15,6574.8 h39.37; Top Overlay "VOUT" at 3003.15,6673.23 h39.37; Top Overlay "GND" at 2176.38,6535.43 h39.37; Top Overlay "VIN" at 2176.38,6633.86 h39.37; Bottom Overlay "Low-Dropout" at 2491.34,6259.84 h78.74 r90; Bottom Overlay "Regulator" at 2629.13,6161.42 h78.74 r90
LDO2: Top Overlay "Regulator" at 6818.11,5577.56 h78.74 r90; Top Overlay "Low-Dropout" at 6660.63,5498.82 h78.74 r90; Top Overlay "VOUT" at 7192.13,5369.29 h39.37; Top Overlay "GND" at 7192.13,5270.87 h39.37; Top Overlay "EN" at 7192.13,5172.44 h39.37; Top Overlay "RST" at 7192.13,5074.02 h39.37; Top Overlay "LDO4" at 7133.07,5152.76 h59.06 r90; Top Overlay "VOUT" at 7192.13,5819.29 h39.37; Top Overlay "GND" at 7192.13,5720.87 h39.37; Top Overlay "EN" at 7192.13,5622.44 h39.37; Top Overlay "RST" at 7192.13,5524.02 h39.37; Top Overlay "LDO3" at 7133.07,5602.76 h59.06 r90; Top Overlay "VOUT" at 7192.13,6269.29 h39.37; Top Overlay "GND" at 7192.13,6170.87 h39.37; Top Overlay "EN" at 7192.13,6072.44 h39.37; Top Overlay "RST" at 7192.13,5974.02 h39.37; Top Overlay "LDO1" at 7133.07,6502.76 h59.06 r90; Top Overlay "RST" at 7192.13,6424.02 h39.37; Top Overlay "EN" at 7192.13,6522.44 h39.37; Top Overlay "GND" at 7192.13,6620.87 h39.37; Top Overlay "VOUT" at 7192.13,6719.29 h39.37; Top Overlay "GND" at 6365.35,6581.5 h39.37; Top Overlay "VIN" at 6365.35,6679.92 h39.37; Bottom Overlay "Low-Dropout" at 6680.31,6305.91 h78.74 r90; Bottom Overlay "Regulator" at 6818.11,6207.48 h78.74 r90
SW1: Top Overlay "LV Switcher" at 2913.39,1889.76 h150 r90; Top Overlay "GND" at 2165.35,2795.28 h118.11 r90; Top Overlay "Vin" at 2165.35,2440.94 h118.11 r90; Top Overlay "GND" at 3602.36,2933.07 h118.11 r90; Top Overlay "Vout" at 3602.36,2598.43 h118.11 r90; Top Overlay "PG" at 3484.25,2204.72 h118.11; Top Overlay "SYNC" at 3346.46,2303.15 h118.11; Top Overlay "EN" at 3484.25,2401.57 h118.11; Bottom Overlay "LV Switcher" at 2913.39,3425.2 h150 r90
SW2: Top Overlay "LV Switcher" at 6751.97,1988.19 h150 r90; Top Overlay "GND" at 6003.94,2893.7 h118.11 r90; Top Overlay "Vin" at 6003.94,2539.37 h118.11 r90; Top Overlay "GND" at 7440.94,3031.5 h118.11 r90; Top Overlay "Vout" at 7440.94,2696.85 h118.11 r90; Top Overlay "PG" at 7322.83,2303.15 h118.11; Top Overlay "SYNC" at 7185.04,2401.57 h118.11; Top Overlay "EN" at 7322.83,2500 h118.11; Bottom Overlay "LV Switcher" at 6751.97,3523.62 h150 r90
TRX1: Top Overlay "TRX" at 3472.5,8931.1 h150; Top Overlay "TRX" at 3869.75,8926.77 h150
TRX2: Top Overlay "TRX" at 76052.5,12811.1 h150; Top Overlay "TRX" at 76449.75,12806.77 h150